# Altium PCB ADAS_ECU_MB_revA.PcbDoc (part 1 of 6)
Units mm, origin at the board's own origin, x right, y up, seen from the top; angles counter-clockwise.
Board outline 180 x 120 mm, 6 copper layers (Top Layer, Mid Layer 1, Mid Layer 2, Mid Layer 3, Mid Layer 4, Bottom Layer), stack 1.554 mm thick; 648 components, 505 nets, 4389 pads, 80 vias.
Unrouted connection lines stored in the file: 197.
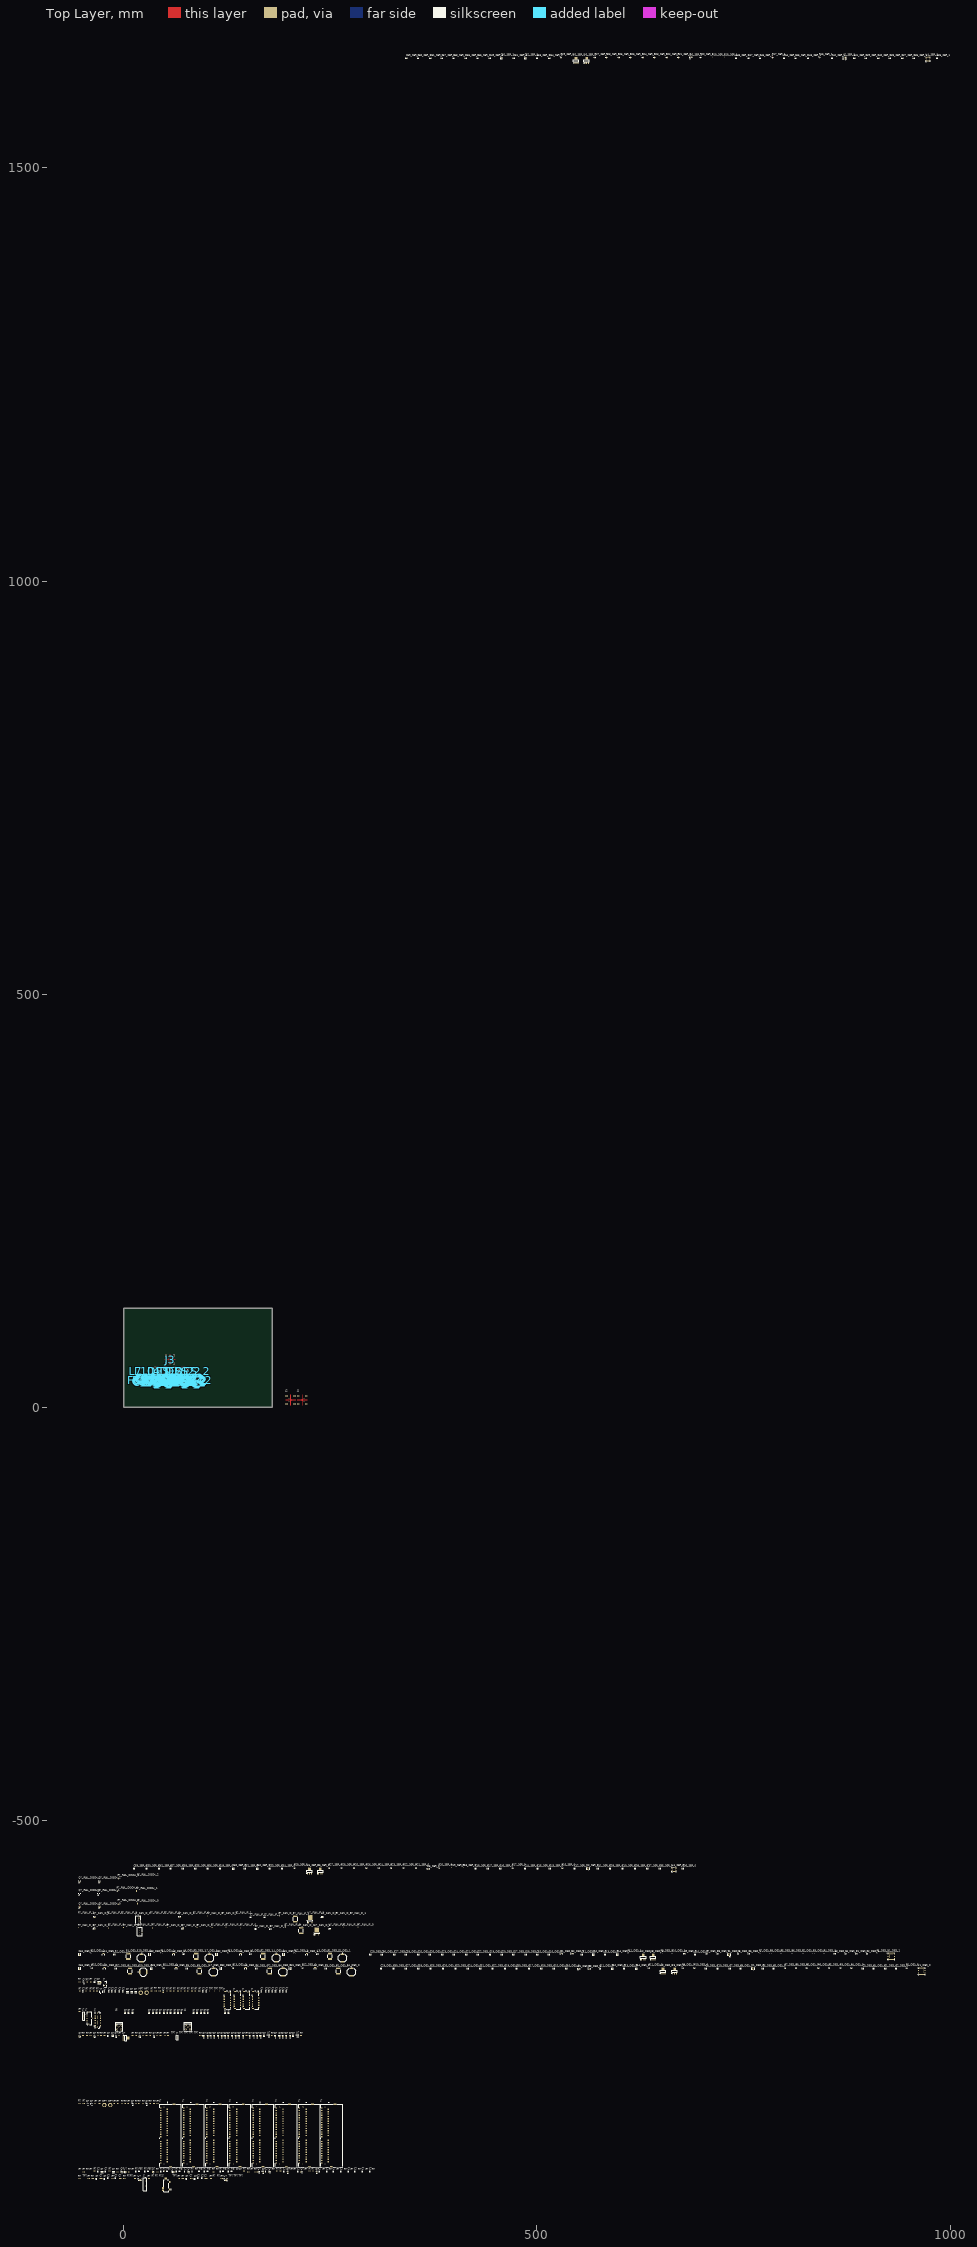
[diagram p0: Top Layer view]
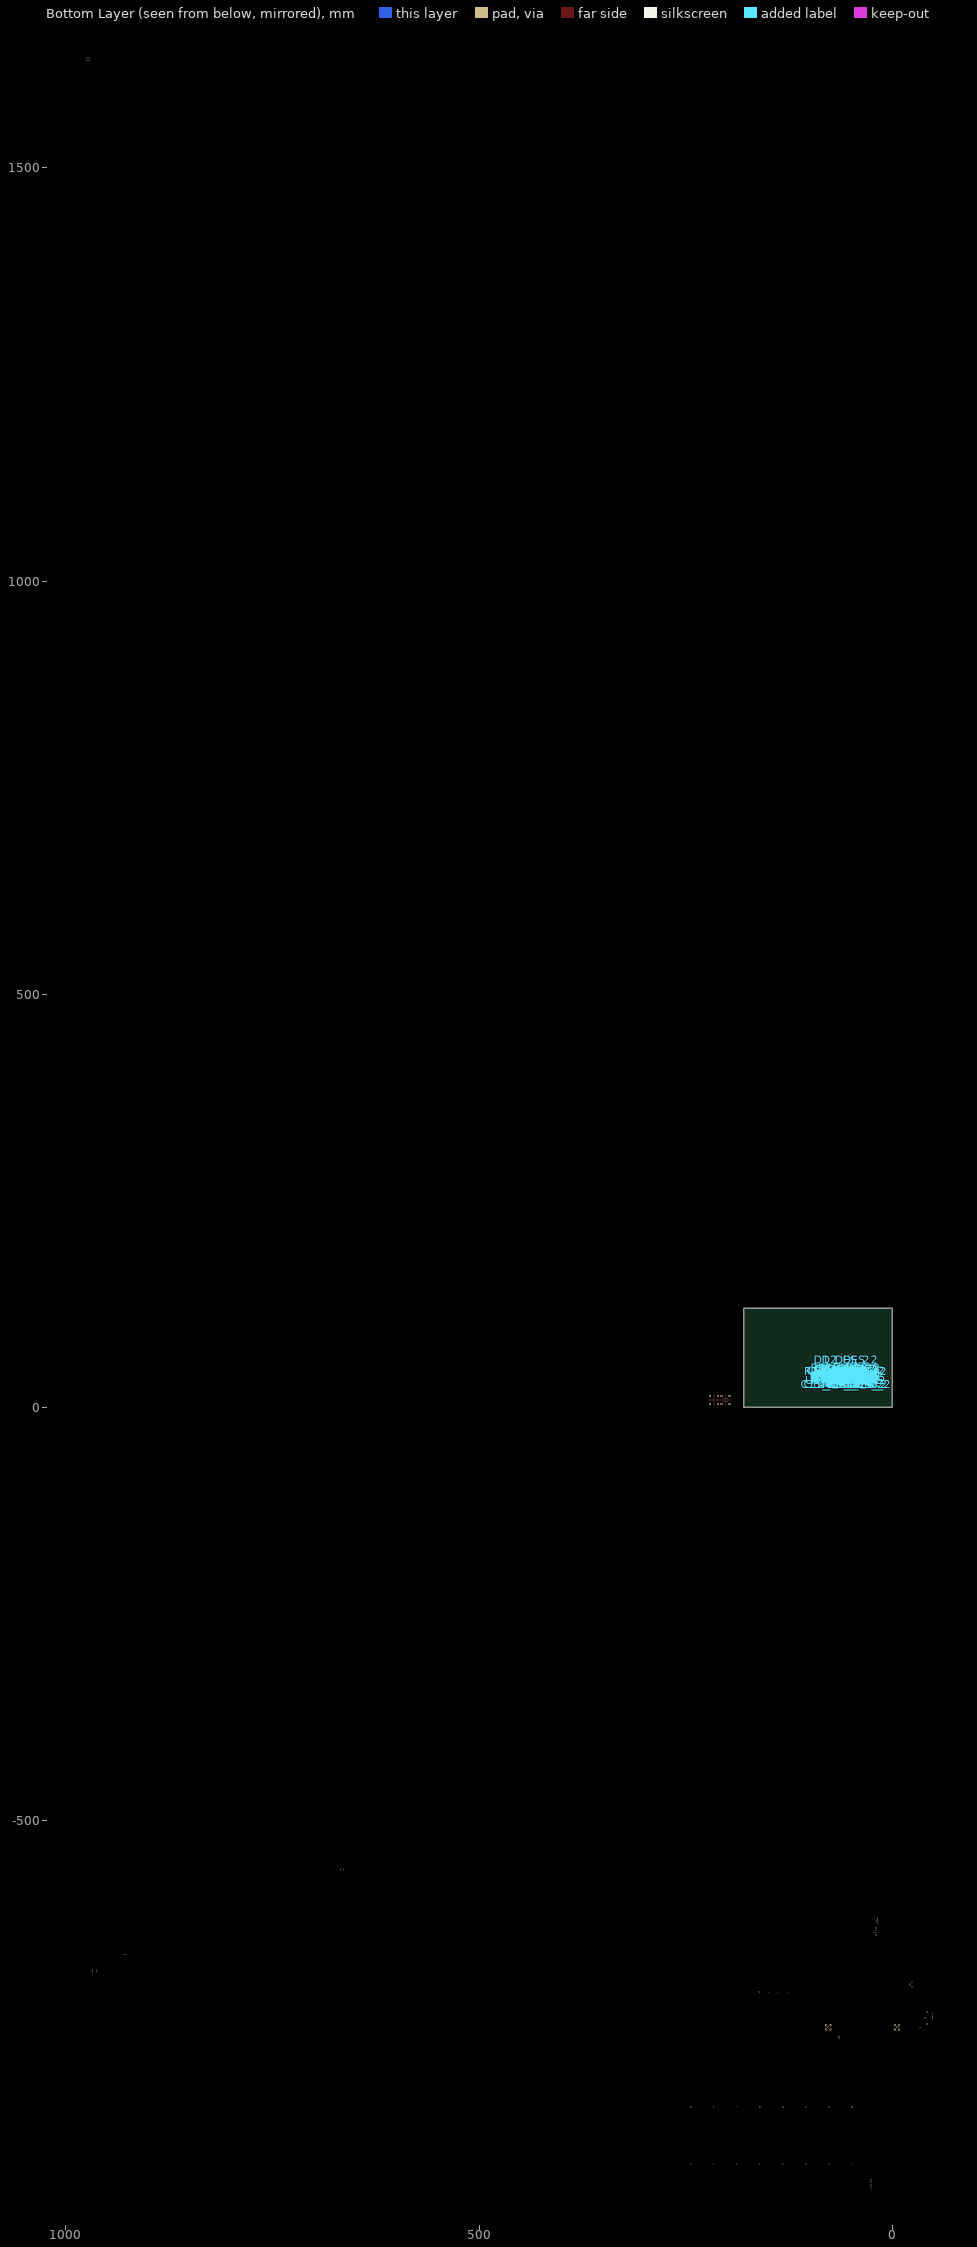
[diagram p1: Bottom Layer view, seen from below]

## Layer stack, top to bottom
Top Solder: solder mask 0.0127, Solder Resist, Dk 3.8
Top Layer: signal copper 0.035
Dielectric 1: prepreg 0.2104, 2313, Dk 4.05
Mid Layer 1: signal copper 0.0152
Core 1: core 0.4, FR-4, Dk 4.5
Mid Layer 2: signal copper 0.0152
Dielectric 2: prepreg 0.2028, 2116, Dk 4.25
Mid Layer 3: signal copper 0.0152
Core 2: core 0.4, FR-4, Dk 4.5
Mid Layer 4: signal copper 0.0152
Dielectric 3: prepreg 0.2104, 2313, Dk 4.05
Bottom Layer: signal copper 0.035
Bottom Solder: solder mask 0.0127, Solder Resist, Dk 3.8

## Board outline
0,0 180,0 180,120 0,120

## Design rules (kind name [scope] priority, off if disabled: settings)
BoardOutlineClearance [All] p1: gap=0.2 ignorepadtopadclearanceinfootprint=FALSE
Clearance [All] p1: gap=0.089 ignorepadtopadclearanceinfootprint=FALSE except(0.127: Arc-Via Track-Via SMDPad-Via THPad-Via Via-Via Via-Fill Via-Poly Via-Region Via-Text; 0.25: Arc-Hole Track-Hole SMDPad-Hole THPad-Hole Via-Hole Fill-Hole Poly-Hole Region-Hole Text-Hole)
ComponentClearance [All] p1: gap=0.089 collisioncheckmode=3 verticalgap=0.089 showdistances=TRUE
DiffPairsRouting 100DIFF [InDifferentialPairClass('100DIFF')] p1: maxlimit=0.2 minlimit=0.127 mostfreqgap=0.127 toplayer_mingap=0.2 toplayer_prefgap=0.2 toplayer_minwidth=0.163 toplayer_maxwidth=0.163 toplayer_prefwidth=0.163 midlayer1_maxgap=0.127 midlayer1_minwidth=0.101 midlayer1_maxwidth=0.101 midlayer1_prefwidth=0.101 midlayer2_maxgap=0.127 midlayer2_minwidth=0.096 midlayer2_maxwidth=0.096 midlayer2_prefwidth=0.096 midlayer3_maxgap=0.127 midlayer3_minwidth=0.096 midlayer3_maxwidth=0.096 midlayer3_prefwidth=0.096 midlayer4_maxgap=0.127 midlayer4_minwidth=0.101 midlayer4_maxwidth=0.101 midlayer4_prefwidth=0.101 bottomlayer_mingap=0.2 bottomlayer_prefgap=0.2 bottomlayer_minwidth=0.163 bottomlayer_maxwidth=0.163 bottomlayer_prefwidth=0.163 impedanceprofiledriven=TRUE impedanceprofileid={C7A9BCC2-5C8B-45AC-9D52-E18A9F04167A} impedanceprofilevalue=100.000000 maxuncoupledlength=12.7
DiffPairsRouting 90DIFF [InDifferentialPairClass('90DIFF')] p2: maxlimit=0.2 minlimit=0.127 mostfreqgap=0.127 toplayer_mingap=0.2 toplayer_prefgap=0.2 toplayer_minwidth=0.222 toplayer_maxwidth=0.222 toplayer_prefwidth=0.222 midlayer1_maxgap=0.127 midlayer1_minwidth=0.141 midlayer1_maxwidth=0.141 midlayer1_prefwidth=0.141 midlayer2_maxgap=0.127 midlayer2_minwidth=0.134 midlayer2_maxwidth=0.134 midlayer2_prefwidth=0.134 midlayer3_maxgap=0.127 midlayer3_minwidth=0.134 midlayer3_maxwidth=0.134 midlayer3_prefwidth=0.134 midlayer4_maxgap=0.127 midlayer4_minwidth=0.141 midlayer4_maxwidth=0.141 midlayer4_prefwidth=0.141 bottomlayer_mingap=0.2 bottomlayer_prefgap=0.2 bottomlayer_minwidth=0.222 bottomlayer_maxwidth=0.222 bottomlayer_prefwidth=0.222 impedanceprofiledriven=TRUE impedanceprofileid={3FA04896-F24A-4C4C-8FE7-887AC91E8F2A} impedanceprofilevalue=90.000000 maxuncoupledlength=12.7
DiffPairsRouting 85DIFF [InDifferentialPairClass('85DIFF')] p3: maxlimit=0.2 minlimit=0.127 mostfreqgap=0.127 toplayer_mingap=0.2 toplayer_prefgap=0.2 toplayer_minwidth=0.259 toplayer_maxwidth=0.259 toplayer_prefwidth=0.259 midlayer1_maxgap=0.127 midlayer1_minwidth=0.166 midlayer1_maxwidth=0.166 midlayer1_prefwidth=0.166 midlayer2_maxgap=0.127 midlayer2_minwidth=0.159 midlayer2_maxwidth=0.159 midlayer2_prefwidth=0.159 midlayer3_maxgap=0.127 midlayer3_minwidth=0.159 midlayer3_maxwidth=0.159 midlayer3_prefwidth=0.159 midlayer4_maxgap=0.127 midlayer4_minwidth=0.166 midlayer4_maxwidth=0.166 midlayer4_prefwidth=0.166 bottomlayer_mingap=0.2 bottomlayer_prefgap=0.2 bottomlayer_minwidth=0.259 bottomlayer_maxwidth=0.259 bottomlayer_prefwidth=0.259 impedanceprofiledriven=TRUE impedanceprofileid={6529A067-EDCB-4022-8723-74E45307CAC3} impedanceprofilevalue=85.000000 maxuncoupledlength=12.7
DiffPairsRouting [All] p4: maxlimit=0.089 minlimit=0.089 mostfreqgap=0.089 toplayer_minwidth=0.089 toplayer_maxwidth=1816.048 toplayer_prefwidth=0.089 midlayer1_minwidth=0.089 midlayer1_maxwidth=1816.048 midlayer1_prefwidth=0.089 midlayer2_minwidth=0.089 midlayer2_maxwidth=1816.048 midlayer2_prefwidth=0.089 midlayer3_minwidth=0.089 midlayer3_maxwidth=1816.048 midlayer3_prefwidth=0.089 midlayer4_minwidth=0.089 midlayer4_maxwidth=1816.048 midlayer4_prefwidth=0.089 bottomlayer_minwidth=0.089 bottomlayer_maxwidth=1816.048 bottomlayer_prefwidth=0.089 maxuncoupledlength=12.7
Height [All] p1: minheight=0 maxheight=1816.048 prefheight=12.7
HoleSize [All] p1: absolutevalues=TRUE maxlimit=6.3 minlimit=0.2 maxpercent=80.000 minpercent=20.000
HoleToHoleClearance [All] p1: gap=0.25 allowstackedmicrovias=FALSE
MinimumAnnularRing [All] p1: minimumring=0.076
MinimumSolderMaskSliver [All] p1: minsoldermaskwidth=0
PlaneClearance [All] p1: clearance=0.089
PlaneConnect PlaneConnectPowerPads [InPadClass('PowerPads')] p1: planeconnectstyle=Direct reliefexpansion=0.508 reliefentries=4 reliefconductorwidth=0.254 reliefairgap=0.254
PlaneConnect [All] p2: pad.planeconnectstyle=Relief pad.reliefexpansion=0.3 pad.reliefentries=4 pad.reliefconductorwidth=0.089 pad.reliefairgap=0.089 via.planeconnectstyle=Direct via.reliefexpansion=0.3 via.reliefentries=4 via.reliefconductorwidth=0.127 via.reliefairgap=0.127
PolygonConnect PolygonConnectPowerPads [All vs (InPadClass('PowerPads'))] p1: connectstyle=Direct reliefconductorwidth=0.254 reliefentries=4 polygonreliefangle="90 Angle" airgapwidth=0.254
PolygonConnect [All] p2: thpad.connectstyle=Relief thpad.reliefconductorwidth=0.089 thpad.reliefentries=4 thpad.polygonreliefangle="90 Angle" thpad.airgapwidth=0.089 smdpad.connectstyle=Relief smdpad.reliefconductorwidth=0.089 smdpad.reliefentries=4 smdpad.polygonreliefangle="90 Angle" smdpad.airgapwidth=0.089 via.connectstyle=Direct via.reliefconductorwidth=0.127 via.reliefentries=4 via.polygonreliefangle="90 Angle" via.airgapwidth=0.127
RoomDefinition DES_2 [InComponentClass('DES_2')] p1: confinementstyle=ConfineIn formatcopy=TRUE lockcomponents=FALSE outline 34,24 78,24 78,68 34,68
RoomDefinition SER_1 [InComponentClass('SER_1')] p2: confinementstyle=ConfineIn formatcopy=TRUE lockcomponents=FALSE outline -322,-342 -197,-342 -197,-271 -322,-271
RoomDefinition SER_0 [InComponentClass('SER_0')] p3: confinementstyle=ConfineIn formatcopy=TRUE lockcomponents=FALSE outline -297,-331 -211,-331 -211,-289 -297,-289
RoomDefinition DES_1 [InComponentClass('DES_1')] p4: confinementstyle=ConfineIn formatcopy=TRUE lockcomponents=FALSE outline -178,-259 -104,-259 -104,-215 -178,-215
RoomDefinition DES_0 [InComponentClass('DES_0')] p5: confinementstyle=ConfineIn formatcopy=TRUE lockcomponents=FALSE outline -310,-343 -266,-343 -266,-314 -310,-314
RoutingVias [All] p1: holewidth=0.2 width=0.45 viastyle="Through Hole" minholewidth=0.2 minwidth=0.45 maxholewidth=6.3 maxwidth=6.55
SilkToSilkClearance [All] p1: silktosilkclearance=0
SilkToSolderMaskClearance [IsPad] p1: minsilkscreentomaskgap=0.089 clearancetoexposedcopper=TRUE
SolderMaskExpansion [All] p1: expansion=0.075 istentingtop=FALSE
SupplyNets "Schematic Supply Nets_8" [InNet('RAIL_RAIL_DISCH_2')] p1: voltage=0.000
SupplyNets "Schematic Supply Nets_7" [InNet('GND')] p2: voltage=0.000
SupplyNets "Schematic Supply Nets_6" [InNet('RAIL_RAIL_DISCH_1')] p3: voltage=0.000
SupplyNets "Schematic Supply Nets_5" [InNet('INT_VCC')] p4: voltage=0.000
SupplyNets "Schematic Supply Nets_4" [InNet('1V8')] p5: voltage=0.000
SupplyNets "Schematic Supply Nets_3" [InNet('5V_MAIN')] p6: voltage=0.000
SupplyNets "Schematic Supply Nets_2" [InNet('1V2')] p7: voltage=0.000
SupplyNets "Schematic Supply Nets_1" [InNet('FAN_VDDIO_FAN_IF_0')] p8: voltage=0.000
SupplyNets "Schematic Supply Nets" [InNet('RAIL_RAIL_DISCH_0')] p9: voltage=0.000
Width 50SINGLE [InNetClass('50SINGLE')] p1: maxlimit=0.199 minlimit=0.17 preferedwidth=0.18 toplayer_minwidth=0.199 toplayer_prefwidth=0.199 midlayer1_minwidth=0.18 midlayer1_maxwidth=0.18 midlayer2_maxwidth=0.17 midlayer2_prefwidth=0.17 midlayer3_maxwidth=0.17 midlayer3_prefwidth=0.17 midlayer4_minwidth=0.18 midlayer4_maxwidth=0.18 bottomlayer_minwidth=0.199 bottomlayer_prefwidth=0.199 impedanceprofiledriven=TRUE impedanceprofileid={5E629595-9142-4542-B4F5-3DDBBC1C75C9} impedanceprofilevalue=50.000000 minimp=50.000000 maximp=50.000000 favimp=50.000000
Width [All] p2: maxlimit=1816.048 minlimit=0.089 preferedwidth=0.089
20 further rules are at their usual default settings.

## Classes and differential pairs
component class REC_USB_0: C? J? Q? R?
component class HDMI_0: C? D? FB? Q? R? U?
component class MAIN_BOARD: C? J1 J2 J3 J4 J5 J? R?
component class NVME_0: C? D? J? MP? R? TP? Y?
component class JETSON: C? D? J? MP? Q? R? TP? U?
differential pair class PRECSI: CKB_DES_0 CKB_DES_1 DB0_DES_0 DB0_DES_1 DB1_DES_0 DB1_DES_1
differential pair class CSI: CLK_SER_0 CLK_SER_1 DA0_SER_0 DA0_SER_1 DA1_SER_0 DA1_SER_1 DA2_SER_0 DA2_SER_1 DA3_SER_0 DA3_SER_1
differential pair class CSI1: CKB_DES_0 CKB_DES_1 CKB_DES_2 DB0_DES_0 DB0_DES_1 DB0_DES_2 DB1_DES_0 DB1_DES_1 DB1_DES_2 DB2_DES_0 DB2_DES_1 DB2_DES_2 DB3_DES_0 DB3_DES_1 DB3_DES_2
differential pair class CSI1_PRE: CKB_DES_0 CKB_DES_1 CKB_DES_2 DB0_DES_0 DB0_DES_1 DB0_DES_2 DB1_DES_0 DB1_DES_1 DB1_DES_2 DB2_DES_0 DB2_DES_1 DB2_DES_2 DB3_DES_0 DB3_DES_1 DB3_DES_2
differential pair class CSI0: CKA_DES_0 CKA_DES_1 CKA_DES_2 DA0_DES_0 DA0_DES_1 DA0_DES_2 DA1_DES_0 DA1_DES_1 DA1_DES_2 DA2_DES_0 DA2_DES_1 DA2_DES_2 DA3_DES_0 DA3_DES_1 DA3_DES_2
differential pair class CSI0_PRE: CKC_DES_0 CKC_DES_1 CKC_DES_2 DA0_DES_0 DA0_DES_1 DA0_DES_2 DA1_DES_0 DA1_DES_1 DA1_DES_2 DA2_DES_0 DA2_DES_1 DA2_DES_2 DA3_DES_0 DA3_DES_1 DA3_DES_2
differential pair class 100DIFF: DB2_DES_0 DB2_DES_1 DB3_DES_0 DB3_DES_1 DP1_TXD0 DP1_TXD1 DP1_TXD2 DP1_TXD3 GBE_MDI0 GBE_MDI1 GBE_MDI2 GBE_MDI3 HDMI_CLK HDMI_D0 HDMI_D1 HDMI_D2 PRE_CSI0_D1 PRE_CSI1_D0 SIO_SER_0 SIO_SER_1 SIOA_DES_0 SIOA_DES_1 SIOA_DES_2 SIOB_DES_0 SIOB_DES_1 SIOB_DES_2 SIOC_DES_0 SIOC_DES_1 SIOC_DES_2 SIOD_DES_0 SIOD_DES_1 SIOD_DES_2
differential pair class 90DIFF: USB0_D USB1_D
differential pair class 85DIFF: PCIE0_CLK PCIE0_RX0 PCIE0_RX1 PCIE0_RX2 PCIE0_RX3 PCIE0_TX0 PCIE0_TX1 PCIE0_TX2 PCIE0_TX3 PCIE_RX0 PCIE_RX1 PCIE_RX2 PCIE_RX3 PRE_CLK PRE_TX0 PRE_TX1 PRE_TX2 PRE_TX3 USBSS0_RX USBSS0_TX
channel class RAIL_DISCHARGE: RAIL_DISCH_0 RAIL_DISCH_1 RAIL_DISCH_2
channel class GMSL_SERIALIZER: SER_0 SER_1
channel class GMSL_DESERIALIZER: DES_0 DES_1 DES_2
channel class FAN_IF: FAN_IF_0 FAN_IF_1
net class PWR: NetC31_DES_0_1 NetC31_DES_1_1 NetC31_DES_2_1 NetC32_DES_0_1 NetC32_DES_1_1 NetC32_DES_2_1 NetC33_DES_0_1 NetC33_DES_1_1 NetC33_DES_2_1 NetC34_DES_0_1 NetC34_DES_1_1 NetC34_DES_2_1 NetF1_DES_0_2 NetF1_DES_1_2 NetF1_DES_2_2 NetF2_DES_0_2 NetF2_DES_1_2 NetF2_DES_2_2 NetF3_DES_0_2 NetF3_DES_1_2 NetF3_DES_2_2 NetF4_DES_0_2 NetF4_DES_1_2 NetF4_DES_2_2 NetL2_DES_0_2 NetL2_DES_1_2 NetL2_DES_2_2 NetL5_DES_0_2 NetL5_DES_1_2 NetL5_DES_2_2 NetL8_DES_0_2 NetL8_DES_1_2 NetL8_DES_2_2 NetL11_DES_0_2 NetL11_DES_1_2 NetL11_DES_2_2 PoC_PWR_DES_0 PoC_PWR_DES_1 PoC_PWR_DES_2
net class 100DIFF: CSI0_CLK_N CSI0_CLK_P CSI0_D0_N CSI0_D0_P CSI0_D1_N CSI0_D1_P CSI1_D0_N CSI1_D0_P CSI1_D1_N CSI1_D1_P CSI2_CLK_N CSI2_CLK_P CSI2_D0_N CSI2_D0_P CSI2_D1_N CSI2_D1_P CSI3_D0_N CSI3_D0_P CSI3_D1_N CSI3_D1_P DP1_TXD0_N DP1_TXD0_P DP1_TXD1_N DP1_TXD1_P DP1_TXD2_N DP1_TXD2_P DP1_TXD3_N DP1_TXD3_P DP_D0_N DP_D0_P DP_D1_N DP_D1_P DP_D2_N DP_D2_P DP_D3_N DP_D3_P GBE_MDI0_N GBE_MDI0_P GBE_MDI1_N GBE_MDI1_P GBE_MDI2_N GBE_MDI2_P GBE_MDI3_N GBE_MDI3_P HDMI_CLK_N HDMI_CLK_P HDMI_D0_N HDMI_D0_P HDMI_D1_N HDMI_D1_P HDMI_D2_N HDMI_D2_P PLDWN_1 PLDWN_2 PLDWN_3 PLDWN_4 PLDWN_5 PLDWN_6 PLDWN_7 PLDWN_8 PRE_CSI0_D1_N PRE_CSI0_D1_P PRE_CSI1_D0_N PRE_CSI1_D0_P
net class 90DIFF: USB0_D_N USB0_D_P USB1_D_N USB1_D_P
net class 85DIFF: PCIE0_CLK_N PCIE0_CLK_P PCIE0_RX0_N PCIE0_RX0_P PCIE0_RX1_N PCIE0_RX1_P PCIE0_RX2_N PCIE0_RX2_P PCIE0_RX3_N PCIE0_RX3_P PCIE0_TX0_N PCIE0_TX0_P PCIE0_TX1_N PCIE0_TX1_P PCIE0_TX2_N PCIE0_TX2_P PCIE0_TX3_N PCIE0_TX3_P PCIE_RX0_N PCIE_RX0_P PCIE_RX1_N PCIE_RX1_P PCIE_RX2_N PCIE_RX2_P PCIE_RX3_N PCIE_RX3_P PRE_CLK_N PRE_CLK_P PRE_TX0_N PRE_TX0_P PRE_TX1_N PRE_TX1_P PRE_TX2_N PRE_TX2_P PRE_TX3_N PRE_TX3_P USBSS0_RX_N USBSS0_RX_P USBSS0_TX_N USBSS0_TX_P
net class 50SINGLE: NetC3_DES_0_2 NetC3_DES_1_2 NetC3_DES_2_2 NetC4_DES_0_2 NetC4_DES_1_2 NetC4_DES_2_2 NetC7_DES_0_2 NetC7_DES_1_2 NetC7_DES_2_2 NetC8_DES_0_2 NetC8_DES_1_2 NetC8_DES_2_2 PoC_A_DES_0 PoC_A_DES_1 PoC_A_DES_2 PoC_B_DES_0 PoC_B_DES_1 PoC_B_DES_2 PoC_C_DES_0 PoC_C_DES_1 PoC_C_DES_2 PoC_D_DES_0 PoC_D_DES_1 PoC_D_DES_2 PoC_TAP_SER_0 PoC_TAP_SER_1
net class 45SINGLE: USB0_D_N USB0_D_P
component class SER_1: C35_SER_1 C36_SER_1 C37_SER_1 C38_SER_1 C39_SER_1 C40_SER_1 C41_SER_1 C42_SER_1 C43_SER_1 C44_SER_1 C45_SER_1 C46_SER_1 C47_SER_1 C48_SER_1 C49_SER_1 C50_SER_1 C51_SER_1 C52_SER_1 C53_SER_1 C54_SER_1 C55_SER_1 C56_SER_1 C57_SER_1 C58_SER_1 C59_SER_1 C60_SER_1 C61_SER_1 D5_SER_1 R16_SER_1 R17_SER_1 R18_SER_1 R19_SER_1 R20_SER_1 R21_SER_1 R22_SER_1 R23_SER_1 R24_SER_1 R25_SER_1 R26_SER_1 R27_SER_1 R28_SER_1 R29_SER_1 U4_SER_1 U5_SER_1 U6_SER_1 Y2_SER_1
component class SER_0: C35_SER_0 C36_SER_0 C37_SER_0 C38_SER_0 C39_SER_0 C40_SER_0 C41_SER_0 C42_SER_0 C43_SER_0 C44_SER_0 C45_SER_0 C46_SER_0 C47_SER_0 C48_SER_0 C49_SER_0 C50_SER_0 C51_SER_0 C52_SER_0 C53_SER_0 C54_SER_0 C55_SER_0 C56_SER_0 C57_SER_0 C58_SER_0 C59_SER_0 C60_SER_0 C61_SER_0 D5_SER_0 R16_SER_0 R17_SER_0 R18_SER_0 R19_SER_0 R20_SER_0 R21_SER_0 R22_SER_0 R23_SER_0 R24_SER_0 R25_SER_0 R26_SER_0 R27_SER_0 R28_SER_0 R29_SER_0 U4_SER_0 U5_SER_0 U6_SER_0 Y2_SER_0
component class RAIL_DISCH_2: Q?_RAIL_DISCH_2 R?_RAIL_DISCH_2
component class RAIL_DISCH_1: Q?_RAIL_DISCH_1 R?_RAIL_DISCH_1
component class RAIL_DISCH_0: Q?_RAIL_DISCH_0 R?_RAIL_DISCH_0
component class FAN_IF_1: C?_FAN_IF_1 F?_FAN_IF_1 J?_FAN_IF_1 Q?_FAN_IF_1 R?_FAN_IF_1 U?_FAN_IF_1
component class FAN_IF_0: C?_FAN_IF_0 F?_FAN_IF_0 J?_FAN_IF_0 Q?_FAN_IF_0 R?_FAN_IF_0 U?_FAN_IF_0
component class DES_2: C1_DES_2 C2_DES_2 C3_DES_2 C4_DES_2 C5_DES_2 C6_DES_2 C7_DES_2 C8_DES_2 C9_DES_2 C10_DES_2 C11_DES_2 C12_DES_2 C13_DES_2 C14_DES_2 C15_DES_2 C16_DES_2 C17_DES_2 C18_DES_2 C19_DES_2 C20_DES_2 C21_DES_2 C22_DES_2 C23_DES_2 C24_DES_2 C25_DES_2 C26_DES_2 C27_DES_2 C28_DES_2 C29_DES_2 C30_DES_2 C31_DES_2 C32_DES_2 C33_DES_2 C34_DES_2 D1_DES_2 D2_DES_2 F1_DES_2 F2_DES_2 F3_DES_2 F4_DES_2 L1_DES_2 L2_DES_2 L3_DES_2 L4_DES_2 L5_DES_2 L6_DES_2 L7_DES_2 L8_DES_2 L9_DES_2 L10_DES_2 L11_DES_2 L12_DES_2 R1_DES_2 R2_DES_2 R3_DES_2 R4_DES_2 R5_DES_2 R6_DES_2 R7_DES_2 R8_DES_2 R9_DES_2 R10_DES_2 R11_DES_2 R12_DES_2 R13_DES_2 R14_DES_2 R15_DES_2 U1_DES_2 U2_DES_2 U3_DES_2 Y1_DES_2
component class DES_1: C1_DES_1 C2_DES_1 C3_DES_1 C4_DES_1 C5_DES_1 C6_DES_1 C7_DES_1 C8_DES_1 C9_DES_1 C10_DES_1 C11_DES_1 C12_DES_1 C13_DES_1 C14_DES_1 C15_DES_1 C16_DES_1 C17_DES_1 C18_DES_1 C19_DES_1 C20_DES_1 C21_DES_1 C22_DES_1 C23_DES_1 C24_DES_1 C25_DES_1 C26_DES_1 C27_DES_1 C28_DES_1 C29_DES_1 C30_DES_1 C31_DES_1 C32_DES_1 C33_DES_1 C34_DES_1 D1_DES_1 D2_DES_1 F1_DES_1 F2_DES_1 F3_DES_1 F4_DES_1 L1_DES_1 L2_DES_1 L3_DES_1 L4_DES_1 L5_DES_1 L6_DES_1 L7_DES_1 L8_DES_1 L9_DES_1 L10_DES_1 L11_DES_1 L12_DES_1 R1_DES_1 R2_DES_1 R3_DES_1 R4_DES_1 R5_DES_1 R6_DES_1 R7_DES_1 R8_DES_1 R9_DES_1 R10_DES_1 R11_DES_1 R12_DES_1 R13_DES_1 R14_DES_1 R15_DES_1 U1_DES_1 U2_DES_1 U3_DES_1 Y1_DES_1
component class DES_0: C1_DES_0 C2_DES_0 C3_DES_0 C4_DES_0 C5_DES_0 C6_DES_0 C7_DES_0 C8_DES_0 C9_DES_0 C10_DES_0 C11_DES_0 C12_DES_0 C13_DES_0 C14_DES_0 C15_DES_0 C16_DES_0 C17_DES_0 C18_DES_0 C19_DES_0 C20_DES_0 C21_DES_0 C22_DES_0 C23_DES_0 C24_DES_0 C25_DES_0 C26_DES_0 C27_DES_0 C28_DES_0 C29_DES_0 C30_DES_0 C31_DES_0 C32_DES_0 C33_DES_0 C34_DES_0 D1_DES_0 D2_DES_0 F1_DES_0 F2_DES_0 F3_DES_0 F4_DES_0 L1_DES_0 L2_DES_0 L3_DES_0 L4_DES_0 L5_DES_0 L6_DES_0 L7_DES_0 L8_DES_0 L9_DES_0 L10_DES_0 L11_DES_0 L12_DES_0 R1_DES_0 R2_DES_0 R3_DES_0 R4_DES_0 R5_DES_0 R6_DES_0 R7_DES_0 R8_DES_0 R9_DES_0 R10_DES_0 R11_DES_0 R12_DES_0 R13_DES_0 R14_DES_0 R15_DES_0 U1_DES_0 U2_DES_0 U3_DES_0 Y1_DES_0
component class DAC_0: C? J? R? TP? U?
differential pair X25_SER_1: +X25_SER_1_P -X25_SER_1_N
differential pair X25_SER_0: +X25_SER_0_P -X25_SER_0_N
differential pair X25_DES_2: +X25_DES_2_P -X25_DES_2_N
differential pair X25_DES_1: +X25_DES_1_P -X25_DES_1_N
differential pair X25_DES_0: +X25_DES_0_P -X25_DES_0_N
differential pair USBSS0_TX: +USBSS0_TX_P -USBSS0_TX_N
differential pair USBSS0_RX: +USBSS0_RX_P -USBSS0_RX_N
differential pair USB1_D: +USB1_D_P -USB1_D_N
differential pair USB0_D: +USB0_D_P -USB0_D_N
differential pair SIOD_DES_2: +SIOD_DES_2_P -SIOD_DES_2_N
differential pair SIOD_DES_1: +SIOD_DES_1_P -SIOD_DES_1_N
differential pair SIOD_DES_0: +SIOD_DES_0_P -SIOD_DES_0_N
differential pair SIOC_DES_2: +SIOC_DES_2_P -SIOC_DES_2_N
differential pair SIOC_DES_1: +SIOC_DES_1_P -SIOC_DES_1_N
differential pair SIOC_DES_0: +SIOC_DES_0_P -SIOC_DES_0_N
differential pair SIOB_DES_2: +SIOB_DES_2_P -SIOB_DES_2_N
differential pair SIOB_DES_1: +SIOB_DES_1_P -SIOB_DES_1_N
differential pair SIOB_DES_0: +SIOB_DES_0_P -SIOB_DES_0_N
differential pair SIOA_DES_2: +SIOA_DES_2_P -SIOA_DES_2_N
differential pair SIOA_DES_1: +SIOA_DES_1_P -SIOA_DES_1_N
differential pair SIOA_DES_0: +SIOA_DES_0_P -SIOA_DES_0_N
differential pair SIO_SER_1: +SIO_SER_1_P -SIO_SER_1_N
differential pair SIO_SER_0: +SIO_SER_0_P -SIO_SER_0_N
differential pair PRE_TX3: +PRE_TX3_P -PRE_TX3_N
differential pair PRE_TX2: +PRE_TX2_P -PRE_TX2_N
differential pair PRE_TX1: +PRE_TX1_P -PRE_TX1_N
differential pair PRE_TX0: +PRE_TX0_P -PRE_TX0_N
differential pair PRE_CSI1_D0: +PRE_CSI1_D0_P -PRE_CSI1_D0_N
differential pair PRE_CSI0_D1: +PRE_CSI0_D1_P -PRE_CSI0_D1_N
differential pair PRE_CLK: +PRE_CLK_P -PRE_CLK_N
differential pair PCIE_RX3: +PCIE_RX3_P -PCIE_RX3_N
differential pair PCIE_RX2: +PCIE_RX2_P -PCIE_RX2_N
differential pair PCIE_RX1: +PCIE_RX1_P -PCIE_RX1_N
differential pair PCIE_RX0: +PCIE_RX0_P -PCIE_RX0_N
differential pair PCIE0_TX3: +PCIE0_TX3_P -PCIE0_TX3_N
differential pair PCIE0_TX2: +PCIE0_TX2_P -PCIE0_TX2_N
differential pair PCIE0_TX1: +PCIE0_TX1_P -PCIE0_TX1_N
differential pair PCIE0_TX0: +PCIE0_TX0_P -PCIE0_TX0_N
differential pair PCIE0_RX3: +PCIE0_RX3_P -PCIE0_RX3_N
differential pair PCIE0_RX2: +PCIE0_RX2_P -PCIE0_RX2_N
differential pair PCIE0_RX1: +PCIE0_RX1_P -PCIE0_RX1_N
differential pair PCIE0_RX0: +PCIE0_RX0_P -PCIE0_RX0_N
differential pair PCIE0_CLK: +PCIE0_CLK_P -PCIE0_CLK_N
differential pair HDMI_D2: +HDMI_D2_P -HDMI_D2_N
differential pair HDMI_D1: +HDMI_D1_P -HDMI_D1_N
differential pair HDMI_D0: +HDMI_D0_P -HDMI_D0_N
differential pair HDMI_CLK: +HDMI_CLK_P -HDMI_CLK_N
differential pair GBE_MDI3: +GBE_MDI3_P -GBE_MDI3_N
differential pair GBE_MDI2: +GBE_MDI2_P -GBE_MDI2_N
differential pair GBE_MDI1: +GBE_MDI1_P -GBE_MDI1_N
differential pair GBE_MDI0: +GBE_MDI0_P -GBE_MDI0_N
differential pair DP1_TXD3: +DP1_TXD3_P -DP1_TXD3_N
differential pair DP1_TXD2: +DP1_TXD2_P -DP1_TXD2_N
differential pair DP1_TXD1: +DP1_TXD1_P -DP1_TXD1_N
differential pair DP1_TXD0: +DP1_TXD0_P -DP1_TXD0_N
differential pair DP1_AUX: +DP1_AUX_P -DP1_AUX_N
differential pair DB3_DES_2: +DB3_DES_2_P -DB3_DES_2_N
differential pair DB3_DES_1: +DB3_DES_1_P -DB3_DES_1_N
differential pair DB3_DES_0: +DB3_DES_0_P -DB3_DES_0_N
differential pair DB2_DES_2: +DB2_DES_2_P -DB2_DES_2_N
differential pair DB2_DES_1: +DB2_DES_1_P -DB2_DES_1_N
differential pair DB2_DES_0: +DB2_DES_0_P -DB2_DES_0_N
differential pair DB1_DES_2: +DB1_DES_2_P -DB1_DES_2_N
differential pair DB1_DES_1: +DB1_DES_1_P -DB1_DES_1_N
differential pair DB1_DES_0: +DB1_DES_0_P -DB1_DES_0_N
differential pair DB0_DES_2: +DB0_DES_2_P -DB0_DES_2_N
differential pair DB0_DES_1: +DB0_DES_1_P -DB0_DES_1_N
differential pair DB0_DES_0: +DB0_DES_0_P -DB0_DES_0_N
differential pair DA3_SER_1: +DA3_SER_1_P -DA3_SER_1_N
differential pair DA3_SER_0: +DA3_SER_0_P -DA3_SER_0_N
differential pair DA3_DES_2: +DA3_DES_2_P -DA3_DES_2_N
differential pair DA3_DES_1: +DA3_DES_1_P -DA3_DES_1_N
differential pair DA3_DES_0: +DA3_DES_0_P -DA3_DES_0_N
differential pair DA2_SER_1: +DA2_SER_1_P -DA2_SER_1_N
differential pair DA2_SER_0: +DA2_SER_0_P -DA2_SER_0_N
differential pair DA2_DES_2: +DA2_DES_2_P -DA2_DES_2_N
differential pair DA2_DES_1: +DA2_DES_1_P -DA2_DES_1_N
differential pair DA2_DES_0: +DA2_DES_0_P -DA2_DES_0_N
differential pair DA1_SER_1: +DA1_SER_1_P -DA1_SER_1_N
differential pair DA1_SER_0: +DA1_SER_0_P -DA1_SER_0_N
differential pair DA1_DES_2: +DA1_DES_2_P -DA1_DES_2_N
differential pair DA1_DES_1: +DA1_DES_1_P -DA1_DES_1_N
differential pair DA1_DES_0: +DA1_DES_0_P -DA1_DES_0_N
differential pair DA0_SER_1: +DA0_SER_1_P -DA0_SER_1_N
differential pair DA0_SER_0: +DA0_SER_0_P -DA0_SER_0_N
differential pair DA0_DES_2: +DA0_DES_2_P -DA0_DES_2_N
differential pair DA0_DES_1: +DA0_DES_1_P -DA0_DES_1_N
differential pair DA0_DES_0: +DA0_DES_0_P -DA0_DES_0_N
differential pair CLK_SER_1: +CLK_SER_1_P -CLK_SER_1_N
differential pair CLK_SER_0: +CLK_SER_0_P -CLK_SER_0_N
differential pair CKB_DES_2: +CKB_DES_2_P -CKB_DES_2_N
differential pair CKB_DES_1: +CKB_DES_1_P -CKB_DES_1_N
differential pair CKB_DES_0: +CKB_DES_0_P -CKB_DES_0_N
differential pair CKA_DES_2: +CKA_DES_2_P -CKA_DES_2_N
differential pair CKA_DES_1: +CKA_DES_1_P -CKA_DES_1_N
differential pair CKA_DES_0: +CKA_DES_0_P -CKA_DES_0_N

## Components (designator, comment, footprint, x,y, rotation, side; value= is the part's Value field where it differs from the comment)
C1_DES_0 "100n" FP-0402-L_1_0_0_05-W_0_5-IPC_A 921.629,-679.081 r90 top (schematic designator C1)
C1_DES_1 "100n" FP-0402-L_1_0_0_05-W_0_5-IPC_A 886.629,-661.08 r90 top (schematic designator C1)
C1_DES_2 "100n" FP-0402-L_1_0_0_05-W_0_5-IPC_A 63,35 r45 bottom (schematic designator C1)
C2_DES_0 "100n" FP-0402-L_1_0_0_05-W_0_5-IPC_A 934.629,-679.081 r90 top (schematic designator C2)
C2_DES_1 "100n" FP-0402-L_1_0_0_05-W_0_5-IPC_A 899.629,-661.08 r90 top (schematic designator C2)
C2_DES_2 "100n" FP-0402-L_1_0_0_05-W_0_5-IPC_A 60,38 r45 bottom (schematic designator C2)
C3_DES_0 "100n" FP-0402-L_1_0_0_05-W_0_5-IPC_A 894.629,-679.081 r90 top (schematic designator C3)
C3_DES_1 "100n" FP-0402-L_1_0_0_05-W_0_5-IPC_A 860.629,-661.08 r90 top (schematic designator C3)
C3_DES_2 "100n" FP-0402-L_1_0_0_05-W_0_5-IPC_A 62,36 r45 bottom (schematic designator C3)
C4_DES_0 "100n" FP-0402-L_1_0_0_05-W_0_5-IPC_A 907.629,-679.081 r90 top (schematic designator C4)
C4_DES_1 "100n" FP-0402-L_1_0_0_05-W_0_5-IPC_A 873.629,-661.08 r90 top (schematic designator C4)
C4_DES_2 "100n" FP-0402-L_1_0_0_05-W_0_5-IPC_A 61,37 r45 bottom (schematic designator C4)
C5_DES_0 "100n" FP-0402-L_1_0_0_05-W_0_5-IPC_A 773.629,-679.081 r90 top (schematic designator C5)
C5_DES_1 "100n" FP-0402-L_1_0_0_05-W_0_5-IPC_A 743.629,-661.08 r90 top (schematic designator C5)
C5_DES_2 "100n" FP-0402-L_1_0_0_05-W_0_5-IPC_A 52,38 r135 bottom (schematic designator C5)
C6_DES_0 "100n" FP-0402-L_1_0_0_05-W_0_5-IPC_A 786.629,-679.081 r90 top (schematic designator C6)
C6_DES_1 "100n" FP-0402-L_1_0_0_05-W_0_5-IPC_A 756.629,-661.08 r90 top (schematic designator C6)
C6_DES_2 "100n" FP-0402-L_1_0_0_05-W_0_5-IPC_A 49,35 r135 bottom (schematic designator C6)
C7_DES_0 "100n" FP-0402-L_1_0_0_05-W_0_5-IPC_A 733.629,-679.081 r90 top (schematic designator C7)
C7_DES_1 "100n" FP-0402-L_1_0_0_05-W_0_5-IPC_A 705.629,-661.08 r90 top (schematic designator C7)
C7_DES_2 "100n" FP-0402-L_1_0_0_05-W_0_5-IPC_A 51,37 r135 bottom (schematic designator C7)
C8_DES_0 "100n" FP-0402-L_1_0_0_05-W_0_5-IPC_A 746.629,-679.081 r90 top (schematic designator C8)
C8_DES_1 "100n" FP-0402-L_1_0_0_05-W_0_5-IPC_A 718.629,-661.08 r90 top (schematic designator C8)
C8_DES_2 "100n" FP-0402-L_1_0_0_05-W_0_5-IPC_A 50,36 r135 bottom (schematic designator C8)
C9_DES_0 "30p" FP-0402-L_1_0_0_05-W_0_5-IPC_A 704.629,-679.081 r90 top (schematic designator C9)
C9_DES_1 "30p" FP-0402-L_1_0_0_05-W_0_5-IPC_A 678.629,-661.08 r90 top (schematic designator C9)
C9_DES_2 "30p" FP-0402-L_1_0_0_05-W_0_5-IPC_A 54,40 r315 bottom (schematic designator C9)
C10_DES_0 "30p" FP-0402-L_1_0_0_05-W_0_5-IPC_A 718.629,-679.081 r90 top (schematic designator C10)
C10_DES_1 "30p" FP-0402-L_1_0_0_05-W_0_5-IPC_A 691.629,-662.08 r90 top (schematic designator C10)
C10_DES_2 "30p" FP-0402-L_1_0_0_05-W_0_5-IPC_A 58,40 r225 bottom (schematic designator C10)
C11_DES_0 "100n" FP-0402-L_1_0_0_05-W_0_5-IPC_A 576.629,-679.081 r90 top (schematic designator C11)
C11_DES_1 "100n" FP-0402-L_1_0_0_05-W_0_5-IPC_A 554.629,-662.08 r90 top (schematic designator C11)
C11_DES_2 "100n" FP-0402-L_1_0_0_05-W_0_5-IPC_A 73,28 r0 bottom (schematic designator C11)
C12_DES_0 "GRM188R60J106ME47D" FP-GRM188-0_1-e0_2_0_55-IPC_A 591.629,-679.081 r90 top (schematic designator C12)
C12_DES_1 "GRM188R60J106ME47D" FP-GRM188-0_1-e0_2_0_55-IPC_A 568.629,-662.08 r90 top (schematic designator C12)
C12_DES_2 "GRM188R60J106ME47D" FP-GRM188-0_1-e0_2_0_55-IPC_A 69,28 r0 bottom (schematic designator C12)
C13_DES_0 "100n" FP-0402-L_1_0_0_05-W_0_5-IPC_A 605.629,-679.081 r90 top (schematic designator C13)
C13_DES_1 "100n" FP-0402-L_1_0_0_05-W_0_5-IPC_A 582.629,-662.08 r90 top (schematic designator C13)
C13_DES_2 "100n" FP-0402-L_1_0_0_05-W_0_5-IPC_A 39,28 r180 bottom (schematic designator C13)
C14_DES_0 "GRM188R60J106ME47D" FP-GRM188-0_1-e0_2_0_55-IPC_A 620.629,-679.081 r90 top (schematic designator C14)
C14_DES_1 "GRM188R60J106ME47D" FP-GRM188-0_1-e0_2_0_55-IPC_A 597.629,-662.08 r90 top (schematic designator C14)
C14_DES_2 "GRM188R60J106ME47D" FP-GRM188-0_1-e0_2_0_55-IPC_A 43,28 r180 bottom (schematic designator C14)
C15_DES_0 "10u" FP-0402-L_1_0_0_05-W_0_5-IPC_A 520.629,-679.081 r90 top (schematic designator C15)
C15_DES_1 "10u" FP-0402-L_1_0_0_05-W_0_5-IPC_A 500.629,-662.08 r90 top (schematic designator C15)
C15_DES_2 "10u" FP-0402-L_1_0_0_05-W_0_5-IPC_A 53.5,35 r225 top (schematic designator C15)
C16_DES_0 "100n" FP-0402-L_1_0_0_05-W_0_5-IPC_A 535.629,-679.081 r90 top (schematic designator C16)
C16_DES_1 "100n" FP-0402-L_1_0_0_05-W_0_5-IPC_A 514.629,-662.08 r90 top (schematic designator C16)
C16_DES_2 "100n" FP-0402-L_1_0_0_05-W_0_5-IPC_A 52.5,36 r225 top (schematic designator C16)
C17_DES_0 "10u" FP-0402-L_1_0_0_05-W_0_5-IPC_A 490.629,-679.081 r90 top (schematic designator C17)
C17_DES_1 "10u" FP-0402-L_1_0_0_05-W_0_5-IPC_A 471.629,-662.08 r90 top (schematic designator C17)
C17_DES_2 "10u" FP-0402-L_1_0_0_05-W_0_5-IPC_A 58.5,35 r315 top (schematic designator C17)
C18_DES_0 "100n" FP-0402-L_1_0_0_05-W_0_5-IPC_A 505.629,-679.081 r90 top (schematic designator C18)
C18_DES_1 "100n" FP-0402-L_1_0_0_05-W_0_5-IPC_A 486.629,-662.08 r90 top (schematic designator C18)
C18_DES_2 "100n" FP-0402-L_1_0_0_05-W_0_5-IPC_A 59.5,36 r315 top (schematic designator C18)
C19_DES_0 "10u" FP-0402-L_1_0_0_05-W_0_5-IPC_A 461.629,-679.081 r90 top (schematic designator C19)
C19_DES_1 "10u" FP-0402-L_1_0_0_05-W_0_5-IPC_A 443.629,-662.08 r90 top (schematic designator C19)
C19_DES_2 "10u" FP-0402-L_1_0_0_05-W_0_5-IPC_A 49,30.5 r45 top (schematic designator C19)
C20_DES_0 "100n" FP-0402-L_1_0_0_05-W_0_5-IPC_A 475.629,-679.081 r90 top (schematic designator C20)
C20_DES_1 "100n" FP-0402-L_1_0_0_05-W_0_5-IPC_A 457.629,-662.08 r90 top (schematic designator C20)
C20_DES_2 "100n" FP-0402-L_1_0_0_05-W_0_5-IPC_A 48,31.5 r45 top (schematic designator C20)
C21_DES_0 "10u" FP-0402-L_1_0_0_05-W_0_5-IPC_A 431.629,-679.081 r90 top (schematic designator C21)
C21_DES_1 "10u" FP-0402-L_1_0_0_05-W_0_5-IPC_A 414.629,-662.08 r90 top (schematic designator C21)
C21_DES_2 "10u" FP-0402-L_1_0_0_05-W_0_5-IPC_A 50.5,32 r225 top (schematic designator C21)
C22_DES_0 "100n" FP-0402-L_1_0_0_05-W_0_5-IPC_A 446.629,-679.081 r90 top (schematic designator C22)
C22_DES_1 "100n" FP-0402-L_1_0_0_05-W_0_5-IPC_A 428.629,-662.08 r90 top (schematic designator C22)
C22_DES_2 "100n" FP-0402-L_1_0_0_05-W_0_5-IPC_A 49.5,33 r225 top (schematic designator C22)
C23_DES_0 "10u" FP-0402-L_1_0_0_05-W_0_5-IPC_A 401.628,-679.081 r90 top (schematic designator C23)
C23_DES_1 "10u" FP-0402-L_1_0_0_05-W_0_5-IPC_A 385.628,-662.08 r90 top (schematic designator C23)
C23_DES_2 "10u" FP-0402-L_1_0_0_05-W_0_5-IPC_A 52,33.5 r45 top (schematic designator C23)
C24_DES_0 "10n" FP-0402-L_1_0_0_05-W_0_5-IPC_A 416.629,-679.081 r90 top (schematic designator C24)
C24_DES_1 "10n" FP-0402-L_1_0_0_05-W_0_5-IPC_A 399.628,-662.08 r90 top (schematic designator C24)
C24_DES_2 "10n" FP-0402-L_1_0_0_05-W_0_5-IPC_A 51,34.5 r45 top (schematic designator C24)
C25_DES_0 "10u" FP-0402-L_1_0_0_05-W_0_5-IPC_A 371.628,-679.081 r90 top (schematic designator C25)
C25_DES_1 "10u" FP-0402-L_1_0_0_05-W_0_5-IPC_A 356.628,-662.08 r90 top (schematic designator C25)
C25_DES_2 "10u" FP-0402-L_1_0_0_05-W_0_5-IPC_A 60,33.5 r135 top (schematic designator C25)
C26_DES_0 "10n" FP-0402-L_1_0_0_05-W_0_5-IPC_A 386.628,-679.081 r90 top (schematic designator C26)
C26_DES_1 "10n" FP-0402-L_1_0_0_05-W_0_5-IPC_A 370.628,-662.08 r90 top (schematic designator C26)
C26_DES_2 "10n" FP-0402-L_1_0_0_05-W_0_5-IPC_A 61,34.5 r135 top (schematic designator C26)
C27_DES_0 "10u" FP-0402-L_1_0_0_05-W_0_5-IPC_A 341.628,-679.081 r90 top (schematic designator C27)
C27_DES_1 "10u" FP-0402-L_1_0_0_05-W_0_5-IPC_A 327.628,-662.08 r90 top (schematic designator C27)
C27_DES_2 "10u" FP-0402-L_1_0_0_05-W_0_5-IPC_A 61.5,32 r315 top (schematic designator C27)
C28_DES_0 "10n" FP-0402-L_1_0_0_05-W_0_5-IPC_A 356.628,-679.081 r90 top (schematic designator C28)
C28_DES_1 "10n" FP-0402-L_1_0_0_05-W_0_5-IPC_A 341.628,-662.08 r90 top (schematic designator C28)
C28_DES_2 "10n" FP-0402-L_1_0_0_05-W_0_5-IPC_A 62.5,33 r315 top (schematic designator C28)
C29_DES_0 "10u" FP-0402-L_1_0_0_05-W_0_5-IPC_A 311.628,-679.081 r90 top (schematic designator C29)
C29_DES_1 "10u" FP-0402-L_1_0_0_05-W_0_5-IPC_A 298.628,-662.08 r90 top (schematic designator C29)
C29_DES_2 "10u" FP-0402-L_1_0_0_05-W_0_5-IPC_A 64,31.5 r315 top (schematic designator C29)
C30_DES_0 "10n" FP-0402-L_1_0_0_05-W_0_5-IPC_A 326.628,-679.081 r90 top (schematic designator C30)
C30_DES_1 "10n" FP-0402-L_1_0_0_05-W_0_5-IPC_A 312.628,-662.08 r90 top (schematic designator C30)
C30_DES_2 "10n" FP-0402-L_1_0_0_05-W_0_5-IPC_A 63,30.5 r315 top (schematic designator C30)
C31_DES_0 "GRM21BR61E226ME44L" FP-GRM21B-0_2-e0_2_0_7-IPC_B 201.628,-679.081 r90 top (schematic designator C31)
C31_DES_1 "GRM21BR61E226ME44L" FP-GRM21B-0_2-e0_2_0_7-IPC_B 193.628,-662.08 r90 top (schematic designator C31)
C31_DES_2 "GRM21BR61E226ME44L" FP-GRM21B-0_2-e0_2_0_7-IPC_B 65.75,44.25 r180 bottom (schematic designator C31)
C32_DES_0 "GRM21BR61E226ME44L" FP-GRM21B-0_2-e0_2_0_7-IPC_B 117.628,-679.081 r90 top (schematic designator C32)
C32_DES_1 "GRM21BR61E226ME44L" FP-GRM21B-0_2-e0_2_0_7-IPC_B 112.628,-662.08 r90 top (schematic designator C32)
C32_DES_2 "GRM21BR61E226ME44L" FP-GRM21B-0_2-e0_2_0_7-IPC_B 57.25,47 r270 bottom (schematic designator C32)
C33_DES_0 "GRM21BR61E226ME44L" FP-GRM21B-0_2-e0_2_0_7-IPC_B 33.628,-679.081 r90 top (schematic designator C33)
C33_DES_1 "GRM21BR61E226ME44L" FP-GRM21B-0_2-e0_2_0_7-IPC_B 31.628,-662.08 r90 top (schematic designator C33)
C33_DES_2 "GRM21BR61E226ME44L" FP-GRM21B-0_2-e0_2_0_7-IPC_B 46.25,44.25 r0 bottom (schematic designator C33)
C34_DES_0 "GRM21BR61E226ME44L" FP-GRM21B-0_2-e0_2_0_7-IPC_B -53.372,-679.081 r90 top (schematic designator C34)
C34_DES_1 "GRM21BR61E226ME44L" FP-GRM21B-0_2-e0_2_0_7-IPC_B -53.372,-662.08 r90 top (schematic designator C34)
C34_DES_2 "GRM21BR61E226ME44L" FP-GRM21B-0_2-e0_2_0_7-IPC_B 54.75,47 r270 bottom (schematic designator C34)
C35_SER_0 "100n" FP-0402-L_1_0_0_05-W_0_5-IPC_A 648.829,-558.08 r90 top (schematic designator C35)
C35_SER_1 "100n" FP-0402-L_1_0_0_05-W_0_5-IPC_A 956.201,1632.6 r90 top (schematic designator C35)
C36_SER_0 "100n" FP-0402-L_1_0_0_05-W_0_5-IPC_A 676.829,-558.08 r90 top (schematic designator C36)
C36_SER_1 "100n" FP-0402-L_1_0_0_05-W_0_5-IPC_A 984.201,1632.6 r90 top (schematic designator C36)
C37_SER_0 "100n" FP-0402-L_1_0_0_05-W_0_5-IPC_A 633.829,-558.08 r90 top (schematic designator C37)
C37_SER_1 "100n" FP-0402-L_1_0_0_05-W_0_5-IPC_A 942.201,1632.6 r90 top (schematic designator C37)
C38_SER_0 "100n" FP-0402-L_1_0_0_05-W_0_5-IPC_A 618.829,-558.08 r90 top (schematic designator C38)
C38_SER_1 "100n" FP-0402-L_1_0_0_05-W_0_5-IPC_A 927.201,1632.6 r90 top (schematic designator C38)
C39_SER_0 "100n" FP-0402-L_1_0_0_05-W_0_5-IPC_A 588.829,-558.08 r90 top (schematic designator C39)
C39_SER_1 "100n" FP-0402-L_1_0_0_05-W_0_5-IPC_A 898.201,1632.6 r90 top (schematic designator C39)
C40_SER_0 "100n" FP-0402-L_1_0_0_05-W_0_5-IPC_A 603.829,-558.08 r90 top (schematic designator C40)
C40_SER_1 "100n" FP-0402-L_1_0_0_05-W_0_5-IPC_A 913.201,1632.6 r90 top (schematic designator C40)
C41_SER_0 "100n" FP-0402-L_1_0_0_05-W_0_5-IPC_A 573.829,-558.08 r90 top (schematic designator C41)
C41_SER_1 "100n" FP-0402-L_1_0_0_05-W_0_5-IPC_A 884.201,1632.6 r90 top (schematic designator C41)
C42_SER_0 "100n" FP-0402-L_1_0_0_05-W_0_5-IPC_A 545.829,-558.08 r90 top (schematic designator C42)
C42_SER_1 "100n" FP-0402-L_1_0_0_05-W_0_5-IPC_A 857.201,1632.6 r90 top (schematic designator C42)
C43_SER_0 "100n" FP-0402-L_1_0_0_05-W_0_5-IPC_A 515.829,-558.08 r90 top (schematic designator C43)
C43_SER_1 "100n" FP-0402-L_1_0_0_05-W_0_5-IPC_A 828.201,1632.6 r90 top (schematic designator C43)
C44_SER_0 "30p" FP-0402-L_1_0_0_05-W_0_5-IPC_A 485.829,-558.08 r90 top (schematic designator C44)
C44_SER_1 "30p" FP-0402-L_1_0_0_05-W_0_5-IPC_A 799.201,1632.6 r90 top (schematic designator C44)
C45_SER_0 "30p" FP-0402-L_1_0_0_05-W_0_5-IPC_A 500.829,-558.08 r90 top (schematic designator C45)
C45_SER_1 "30p" FP-0402-L_1_0_0_05-W_0_5-IPC_A 813.201,1632.6 r90 top (schematic designator C45)
C46_SER_0 "100n" FP-0402-L_1_0_0_05-W_0_5-IPC_A 455.828,-558.08 r90 top (schematic designator C46)
C46_SER_1 "100n" FP-0402-L_1_0_0_05-W_0_5-IPC_A 770.201,1632.6 r90 top (schematic designator C46)
C47_SER_0 "100n" FP-0402-L_1_0_0_05-W_0_5-IPC_A 440.828,-558.08 r90 top (schematic designator C47)
C47_SER_1 "100n" FP-0402-L_1_0_0_05-W_0_5-IPC_A 756.201,1632.6 r90 top (schematic designator C47)
C48_SER_0 "100n" FP-0402-L_1_0_0_05-W_0_5-IPC_A 425.828,-558.08 r90 top (schematic designator C48)
C48_SER_1 "100n" FP-0402-L_1_0_0_05-W_0_5-IPC_A 741.201,1632.6 r90 top (schematic designator C48)
C49_SER_0 "100n" FP-0402-L_1_0_0_05-W_0_5-IPC_A 116.828,-558.08 r90 top (schematic designator C49)
C49_SER_1 "100n" FP-0402-L_1_0_0_05-W_0_5-IPC_A 443.2,1632.6 r90 top (schematic designator C49)
C50_SER_0 "GRM188R60J106ME47D" FP-GRM188-0_1-e0_2_0_55-IPC_A 132.828,-558.08 r90 top (schematic designator C50)
C50_SER_1 "GRM188R60J106ME47D" FP-GRM188-0_1-e0_2_0_55-IPC_A 457.2,1632.6 r90 top (schematic designator C50)
C51_SER_0 "100n" FP-0402-L_1_0_0_05-W_0_5-IPC_A 146.828,-558.08 r90 top (schematic designator C51)
C51_SER_1 "100n" FP-0402-L_1_0_0_05-W_0_5-IPC_A 472.2,1632.6 r90 top (schematic designator C51)
C52_SER_0 "GRM188R60J106ME47D" FP-GRM188-0_1-e0_2_0_55-IPC_A 161.828,-558.08 r90 top (schematic designator C52)
C52_SER_1 "GRM188R60J106ME47D" FP-GRM188-0_1-e0_2_0_55-IPC_A 486.2,1632.6 r90 top (schematic designator C52)
C53_SER_0 "100n" FP-0402-L_1_0_0_05-W_0_5-IPC_A 176.828,-558.08 r90 top (schematic designator C53)
C53_SER_1 "100n" FP-0402-L_1_0_0_05-W_0_5-IPC_A 500.2,1632.6 r90 top (schematic designator C53)
C54_SER_0 "10n" FP-0402-L_1_0_0_05-W_0_5-IPC_A 191.828,-558.08 r90 top (schematic designator C54)
C54_SER_1 "10n" FP-0402-L_1_0_0_05-W_0_5-IPC_A 515.2,1632.6 r90 top (schematic designator C54)
C55_SER_0 "100n" FP-0402-L_1_0_0_05-W_0_5-IPC_A 86.828,-558.08 r90 top (schematic designator C55)
C55_SER_1 "100n" FP-0402-L_1_0_0_05-W_0_5-IPC_A 414.2,1632.6 r90 top (schematic designator C55)
C56_SER_0 "10n" FP-0402-L_1_0_0_05-W_0_5-IPC_A 101.828,-558.08 r90 top (schematic designator C56)
C56_SER_1 "10n" FP-0402-L_1_0_0_05-W_0_5-IPC_A 428.2,1632.6 r90 top (schematic designator C56)
C57_SER_0 "100n" FP-0402-L_1_0_0_05-W_0_5-IPC_A 56.828,-558.08 r90 top (schematic designator C57)
C57_SER_1 "100n" FP-0402-L_1_0_0_05-W_0_5-IPC_A 385.2,1632.6 r90 top (schematic designator C57)
C58_SER_0 "10n" FP-0402-L_1_0_0_05-W_0_5-IPC_A 71.828,-558.08 r90 top (schematic designator C58)
C58_SER_1 "10n" FP-0402-L_1_0_0_05-W_0_5-IPC_A 399.2,1632.6 r90 top (schematic designator C58)
C59_SER_0 "10u" FP-0402-L_1_0_0_05-W_0_5-IPC_A 12.828,-558.08 r90 top (schematic designator C59)
C59_SER_1 "10u" FP-0402-L_1_0_0_05-W_0_5-IPC_A 342.2,1632.6 r90 top (schematic designator C59)
C60_SER_0 "10u" FP-0402-L_1_0_0_05-W_0_5-IPC_A 27.828,-558.08 r90 top (schematic designator C60)
C60_SER_1 "10u" FP-0402-L_1_0_0_05-W_0_5-IPC_A 356.2,1632.6 r90 top (schematic designator C60)
C61_SER_0 "100n" FP-0402-L_1_0_0_05-W_0_5-IPC_A 42.828,-558.08 r90 top (schematic designator C61)
C61_SER_1 "100n" FP-0402-L_1_0_0_05-W_0_5-IPC_A 371.2,1632.6 r90 top (schematic designator C61)
C? "C1005X7R1H104K050BB" FP-C1005-050-0_05-IPC_C 193.628,-924.081 r0 top
C? "GRM188R60J106ME47D" FP-GRM188-0_1-e0_2_0_55-IPC_A -12.372,-925.081 r0 top
C? "C0402C479C5GACTU" FP-C0402-BB-MFG 171.628,-924.081 r0 top value="4.7 pF"
C? "GRM1555C1H120GA01D" FP-GRM155-0_05-MFG 73.628,-924.081 r0 top
C? "C1005X7R1H104K050BB" FP-C1005-050-0_05-IPC_C 262.628,-924.081 r0 top
C? "C1005X7R1H104K050BB" FP-C1005-050-0_05-IPC_C 297.628,-924.081 r0 top
C? "C1005X7R1H104K050BB" FP-C1005-050-0_05-IPC_C 288.628,-924.081 r0 top
C? "C1005X7R1H104K050BB" FP-C1005-050-0_05-IPC_C -31.372,-924.081 r0 top
C? "C0402C479C5GACTU" FP-C0402-BB-MFG 210.628,-924.081 r0 top value="4.7 pF"
C? "C1005X7R1H104K050BB" FP-C1005-050-0_05-IPC_C 245.628,-924.081 r0 top
C? "100n" FP-0402-L_1_0_0_05-W_0_5-IPC_A 35.628,-732.081 r0 top
C? "100n" FP-0402-L_1_0_0_05-W_0_5-IPC_A 122.628,-732.081 r0 top
C? "100n" FP-0402-L_1_0_0_05-W_0_5-IPC_A 39.628,-732.081 r0 top
C? "100n" FP-0402-L_1_0_0_05-W_0_5-IPC_A 52.628,-732.081 r0 top
C? "100n" FP-0402-L_1_0_0_05-W_0_5-IPC_A 126.628,-732.081 r0 top
C? "C1005X7R1H104K050BB" FP-C1005-050-0_05-IPC_C -19.372,-760.081 r0 top
C? "100nF" FP-0402-L_1_0_0_05-W_0_5-IPC_A 204.628,-760.081 r0 top
C? "100nF" FP-0402-L_1_0_0_05-W_0_5-IPC_A 169.628,-760.081 r0 top
C? "100n" FP-0402-L_1_0_0_05-W_0_5-IPC_A 5.628,-732.081 r0 top
C? "GRM188R60J106ME47D" FP-GRM188-0_1-e0_2_0_55-IPC_A -13.372,-760.081 r0 top
C? "C0805C221K5RACTU" CAPC2013X88X50ML20T25 -4.372,-933.081 r0 top
C? "CL05A106MP5NUNC" FP-CL05A106MP5NUNC-MFG -19.372,-932.081 r0 top value=10uF
C? "C0805C221K5RACTU" CAPC2013X88X50ML20T25 -27.372,-933.081 r0 top
C? "C1005X7R1H104K050BB" FP-C1005-050-0_05-IPC_C 85.628,-933.081 r0 top
C? "C0805C221K5RACTU" CAPC2013X88X50ML20T25 81.628,-933.081 r0 top
C? "C0805C221K5RACTU" CAPC2013X88X50ML20T25 99.628,-933.081 r0 top
C? "CL05A106MP5NUNC" FP-CL05A106MP5NUNC-MFG 89.628,-932.081 r0 top value=10uF
C? "CL05A106MP5NUNC" FP-CL05A106MP5NUNC-MFG -10.372,-932.081 r0 top value=10uF
C? "C1005X7R1H104K050BB" FP-C1005-050-0_05-IPC_C 75.628,-933.081 r0 top
C? "CL05A106MP5NUNC" FP-CL05A106MP5NUNC-MFG 94.628,-932.081 r0 top value=10uF
C? "C0402C221K5RAC7867" CAPC1005X60X30NL05T10 140.628,-924.081 r0 top
C? "GRM188R60J106ME47D" FP-GRM188-0_1-e0_2_0_55-IPC_A -26.372,-925.081 r0 top
C? "C1005X7R1H104K050BB" FP-C1005-050-0_05-IPC_C 253.628,-924.081 r0 top
C? "C1005X7R1H104K050BB" FP-C1005-050-0_05-IPC_C 271.628,-924.081 r0 top
C? "C1005X7R1H104K050BB" FP-C1005-050-0_05-IPC_C 279.628,-924.081 r0 top
C? "C1005X7R1H104K050BB" FP-C1005-050-0_05-IPC_C -23.372,-933.081 r0 top
C? "C1005X7R1H104K050BB" FP-C1005-050-0_05-IPC_C -33.372,-933.081 r0 top
C? "C0402C221K5RAC7867" CAPC1005X60X30NL05T10 136.628,-924.081 r0 top
C? "C1005X7R1H104K050BB" FP-C1005-050-0_05-IPC_C 236.628,-924.081 r0 top
C? "C1005X7R1H104K050BB" FP-C1005-050-0_05-IPC_C -22.372,-924.081 r0 top
C? "C1005X7R1A224K050BB" FP-C1005-050-0_05-IPC_C 188.628,-706.081 r0 top
C? "C1005X7R1H104K050BB" FP-C1005-050-0_05-IPC_C -18.372,-706.081 r0 top
C? "C1005X7R1A224K050BB" FP-C1005-050-0_05-IPC_C 99.628,-706.081 r0 top
C? "GRM188R60J106ME47D" FP-GRM188-0_1-e0_2_0_55-IPC_A 4.628,-707.081 r0 top
C? "C1005X7R1A224K050BB" FP-C1005-050-0_05-IPC_C 95.628,-706.081 r0 top
C? "C1005X7R1A224K050BB" FP-C1005-050-0_05-IPC_C 179.628,-706.081 r0 top
C? "C1005X7R1A224K050BB" FP-C1005-050-0_05-IPC_C 192.628,-706.081 r0 top
C? "C1005X7R1H104K050BB" FP-C1005-050-0_05-IPC_C -14.372,-706.081 r0 top
C? "GRM188R60J106ME47D" FP-GRM188-0_1-e0_2_0_55-IPC_A 9.628,-707.081 r0 top
C? "C1005X7R1A224K050BB" FP-C1005-050-0_05-IPC_C 166.628,-706.081 r0 top
C? "C1005X7R1H104K050BB" FP-C1005-050-0_05-IPC_C -10.372,-706.081 r0 top
C? "C1005X7R1H104K050BB" FP-C1005-050-0_05-IPC_C -35.372,-695.081 r0 top
C? "T520B337M2R5ATE045" KEMT-520-B-2_M -29.372,-696.081 r0 top
C? "C1005X7R1A224K050BB" FP-C1005-050-0_05-IPC_C 183.628,-706.081 r0 top
C? "C1005X7R1A224K050BB" FP-C1005-050-0_05-IPC_C 175.628,-706.081 r0 top
C? "C1005X7R1H104K050BB" FP-C1005-050-0_05-IPC_C -23.372,-706.081 r0 top
C? "C1005X7R1H104K050BB" FP-C1005-050-0_05-IPC_C -5.372,-706.081 r0 top
C? "GRM188R60J106ME47D" FP-GRM188-0_1-e0_2_0_55-IPC_A 14.628,-707.081 r0 top
C? "100n" FP-0402-L_1_0_0_05-W_0_5-IPC_A 88.628,-732.081 r0 top
C? "100n" FP-0402-L_1_0_0_05-W_0_5-IPC_A 61.628,-732.081 r0 top
C? "100n" FP-0402-L_1_0_0_05-W_0_5-IPC_A 93.628,-732.081 r0 top
C? "100n" FP-0402-L_1_0_0_05-W_0_5-IPC_A 10.628,-732.081 r0 top
C? "100n" FP-0402-L_1_0_0_05-W_0_5-IPC_A 56.628,-732.081 r0 top
C? "100n" FP-0402-L_1_0_0_05-W_0_5-IPC_A 101.628,-732.081 r0 top
C? "100n" FP-0402-L_1_0_0_05-W_0_5-IPC_A 48.628,-732.081 r0 top
C? "100n" FP-0402-L_1_0_0_05-W_0_5-IPC_A 43.628,-732.081 r0 top
C? "100n" FP-0402-L_1_0_0_05-W_0_5-IPC_A 1.628,-732.081 r0 top
C? "C1005X7R1A224K050BB" FP-C1005-050-0_05-IPC_C 196.628,-706.081 r0 top
C? "C1005X7R1A224K050BB" FP-C1005-050-0_05-IPC_C 171.628,-706.081 r0 top
C? "C1005X7R1H104K050BB" FP-C1005-050-0_05-IPC_C -1.372,-706.081 r0 top
C? "C1005X7R1H104K050BB" FP-C1005-050-0_05-IPC_C -49.372,-706.081 r0 top
C? "100n" FP-0402-L_1_0_0_05-W_0_5-IPC_A 69.628,-732.081 r0 top
C? "100n" FP-0402-L_1_0_0_05-W_0_5-IPC_A 30.628,-732.081 r0 top
C? "100n" FP-0402-L_1_0_0_05-W_0_5-IPC_A 65.628,-732.081 r0 top
C? "100n" FP-0402-L_1_0_0_05-W_0_5-IPC_A 84.628,-732.081 r0 top
C? "100n" FP-0402-L_1_0_0_05-W_0_5-IPC_A 97.628,-732.081 r0 top
C?_FAN_IF_0 "C1005X7R1H104K050BB" FP-C1005-050-0_05-IPC_C 177.628,-631.08 r90 top (schematic designator C?)
C?_FAN_IF_0 "C1005X7R1H104K050BB" FP-C1005-050-0_05-IPC_C 159.628,-631.08 r90 top (schematic designator C?)
C?_FAN_IF_1 "C1005X7R1H104K050BB" FP-C1005-050-0_05-IPC_C 170.628,-617.08 r90 top (schematic designator C?)
C?_FAN_IF_1 "C1005X7R1H104K050BB" FP-C1005-050-0_05-IPC_C 153.628,-617.08 r90 top (schematic designator C?)
D1_DES_0 "ESD204DQAR" FP-DQA0010A-MFG 550.629,-679.081 r90 top value=0.55pF (schematic designator D1)
D1_DES_1 "ESD204DQAR" FP-DQA0010A-MFG 529.629,-661.08 r90 top value=0.55pF (schematic designator D1)
D1_DES_2 "ESD204DQAR" FP-DQA0010A-MFG 61,58 r180 bottom value=0.55pF (schematic designator D1)
D2_DES_0 "ESD204DQAR" FP-DQA0010A-MFG 563.629,-679.081 r90 top value=0.55pF (schematic designator D2)
D2_DES_1 "ESD204DQAR" FP-DQA0010A-MFG 542.629,-661.08 r90 top value=0.55pF (schematic designator D2)
D2_DES_2 "ESD204DQAR" FP-DQA0010A-MFG 51,58 r0 bottom value=0.55pF (schematic designator D2)
D5_SER_0 "ESD204DQAR" FP-DQA0010A-MFG 368.828,-558.08 r90 top value=0.55pF (schematic designator D5)
D5_SER_1 "ESD204DQAR" FP-DQA0010A-MFG 686.201,1633.6 r90 top value=0.55pF (schematic designator D5)
D? "ESD204DQAR or PUSB3AB4Z" FP-DQA0010A-MFG 126.628,-761.081 r0 top value=0.55pF
D? "ESD204DQAR" FP-DQA0010A-MFG 157.628,-761.081 r0 top value=0.55pF
D? "ESD204DQAR or PUSB3AB4Z" FP-DQA0010A-MFG 101.628,-761.081 r0 top value=0.55pF
D? "ESD204DQAR or PUSB3AB4Z" FP-DQA0010A-MFG 96.628,-761.081 r0 top value=0.55pF
D? "ESD204DQAR" FP-DQA0010A-MFG 135.628,-761.081 r0 top value=0.55pF
D? "ESD204DQAR or PUSB3AB4Z" FP-DQA0010A-MFG 114.628,-761.081 r0 top value=0.55pF
D? "ESD204DQAR or PUSB3AB4Z" FP-DQA0010A-MFG 183.628,-761.081 r0 top value=0.55pF
D? "ESD204DQAR or PUSB3AB4Z" FP-DQA0010A-MFG 233.628,-925.081 r0 top value=0.55pF
D? "ESD204DQAR or PUSB3AB4Z" FP-DQA0010A-MFG 168.628,-925.081 r0 top value=0.55pF
D? "BAT54CWT1G" ONSC-SOT-323-3-419-04_V 35.628,-925.081 r0 top
D? "ESD204DQAR" FP-DQA0010A-MFG 196.628,-761.081 r0 top value=0.55pF
D? "ESD204DQAR or PUSB3AB4Z" FP-DQA0010A-MFG 122.628,-761.081 r0 top value=0.55pF
D? "ESD204DQAR or PUSB3AB4Z" FP-DQA0010A-MFG 198.628,-925.081 r0 top value=0.55pF
D? "ESD204DQAR or PUSB3AB4Z" FP-DQA0010A-MFG 105.628,-761.081 r0 top value=0.55pF
D? "ESD204DQAR or PUSB3AB4Z" FP-DQA0010A-MFG 144.628,-761.081 r0 top value=0.55pF
D? "ESD204DQAR or PUSB3AB4Z" FP-DQA0010A-MFG 152.628,-761.081 r0 top value=0.55pF
D? "150066RG54050" WL-SBCD_0606 47.628,-707.081 r0 top
D? "ESD204DQAR" FP-DQA0010A-MFG 139.628,-761.081 r0 top value=0.55pF
D? "ESD204DQAR or PUSB3AB4Z" FP-DQA0010A-MFG 201.628,-761.081 r0 top value=0.55pF
D? "ESD204DQAR" FP-DQA0010A-MFG 161.628,-761.081 r0 top value=0.55pF
D? "ESD204DQAR or PUSB3AB4Z" FP-DQA0010A-MFG 131.628,-761.081 r0 top value=0.55pF
D? "ESD204DQAR or PUSB3AB4Z" FP-DQA0010A-MFG 109.628,-761.081 r0 top value=0.55pF
D? "ESD204DQAR or PUSB3AB4Z" FP-DQA0010A-MFG 118.628,-761.081 r0 top value=0.55pF
D? "ESD204DQAR" FP-DQA0010A-MFG 165.628,-761.081 r0 top value=0.55pF
D? "ESD204DQAR" FP-DQA0010A-MFG 188.628,-761.081 r0 top value=0.55pF
D? "ESD204DQAR" FP-DQA0010A-MFG 192.628,-761.081 r0 top value=0.55pF
F1_DES_0 "2920L050DR" FP-2920L050DR-MFG 259.628,-682.081 r90 top (schematic designator F1)
F1_DES_1 "2920L050DR" FP-2920L050DR-MFG 249.628,-664.081 r90 top (schematic designator F1)
F1_DES_2 "2920L050DR" FP-2920L050DR-MFG 74.5,33 r90 top (schematic designator F1)
F2_DES_0 "2920L050DR" FP-2920L050DR-MFG 176.628,-682.081 r90 top (schematic designator F2)
F2_DES_1 "2920L050DR" FP-2920L050DR-MFG 168.628,-664.081 r90 top (schematic designator F2)
F2_DES_2 "2920L050DR" FP-2920L050DR-MFG 68.5,33 r90 top (schematic designator F2)
F3_DES_0 "2920L050DR" FP-2920L050DR-MFG 91.628,-682.081 r90 top (schematic designator F3)
F3_DES_1 "2920L050DR" FP-2920L050DR-MFG 87.628,-664.081 r90 top (schematic designator F3)
F3_DES_2 "2920L050DR" FP-2920L050DR-MFG 37.5,33 r90 top (schematic designator F3)
F4_DES_0 "2920L050DR" FP-2920L050DR-MFG 7.628,-682.081 r90 top (schematic designator F4)
F4_DES_1 "2920L050DR" FP-2920L050DR-MFG 5.628,-664.081 r90 top (schematic designator F4)
F4_DES_2 "2920L050DR" FP-2920L050DR-MFG 43.5,33 r90 top (schematic designator F4)
F?_FAN_IF_0 "2920L050DR" FP-2920L050DR-MFG 214.628,-633.08 r90 top (schematic designator F?)
F?_FAN_IF_1 "2920L050DR" FP-2920L050DR-MFG 207.628,-619.08 r90 top (schematic designator F?)
FB? "BLM15PX601SN1D" FP-BLM15-0_05-MFG 101.628,-924.081 r90 top
FB? "BLM15PX601SN1D" FP-BLM15-0_05-MFG 18.628,-924.081 r90 top
FB? "BLM15PX601SN1D" FP-BLM15-0_05-MFG 52.628,-924.081 r90 top
FB? "BLM15PX601SN1D" FP-BLM15-0_05-MFG 67.628,-924.081 r90 top
FB? "BLM15PX601SN1D" FP-BLM15-0_05-MFG 120.628,-924.081 r90 top
FB? "BLM15PX601SN1D" FP-BLM15-0_05-MFG 130.628,-924.081 r90 top
FB? "BLM15PX601SN1D" FP-BLM15-0_05-MFG 91.628,-924.081 r90 top
FB? "BLM15PX601SN1D" FP-BLM15-0_05-MFG 29.628,-924.081 r90 top
J1 "FM4-NZSP-PCB-1" FM4-NZSP-PCB-1-Footprint-1 216,9 r0 top
J2 "FM4-NZSP-PCB-1" FM4-NZSP-PCB-1-Footprint-1 202,9 r0 top
J3 "FM4-NZSP-PCB-1" FM4-NZSP-PCB-1-Footprint-1 56,58 r0 top
J4 "FA1-NDRP-PCB-8" FA1-NDRP-PCB-8-Footprint-1 77.628,-750.081 r0 top
J5 "FA1-NDRP-PCB-8" FA1-NDRP-PCB-8-Footprint-1 -5.372,-750.081 r0 top
J? "2309413-1" FP-2309413-1-MFG 196.628,-881.081 r90 top
J? "2309413-1" FP-2309413-1-MFG 224.628,-881.081 r90 top
J? "2309413-1" FP-2309413-1-MFG 140.628,-881.081 r90 top
J? "2309413-1" FP-2309413-1-MFG 112.628,-881.081 r90 top
J? "2309413-1" FP-2309413-1-MFG 56.628,-881.081 r90 top
J? "TSW-102-07-L-S" FP-TSW-102-07-L-S-MFG 64.628,-762.081 r90 top
J? "35RASMT4BHNTRX" SWIT-35RASMT4BHNTRX_V 51.628,-940.081 r90 top
J? "B7B-PH-K-S" FP-B7B-PH-K-S-MFG 25.628,-940.081 r90 top
J? "2309413-1" FP-2309413-1-MFG 251.628,-881.081 r90 top
J? "2309413-1" FP-2309413-1-MFG 168.628,-881.081 r90 top
J? "2309413-1" FP-2309413-1-MFG 84.628,-881.081 r90 top
J? "1-2199230-6" FP-1-2199230-6-MFG 125.628,-717.081 r90 top
J? "1-2199230-6" FP-1-2199230-6-MFG 137.628,-717.081 r90 top
J? "1-2199230-6" FP-1-2199230-6-MFG 148.628,-717.081 r90 top
J? "105133-0001" MOLX-105133-0001_V -22.372,-698.081 r90 top
J? "1-2199230-6" FP-1-2199230-6-MFG 159.628,-717.081 r90 top
J? "HTSW-104-07-G-S" FP-HTSW-104-07-G-S-MFG -48.372,-736.081 r90 top
J? "47659-1102" FP-47659-1102-MFG -41.372,-739.081 r90 top
J? "QTH-020-02-L-D-DP-A-K" QTH-020-02-L-D-DP-A-K-Footprint-1 -31.372,-741.081 r90 top
J?_FAN_IF_0 "47053-1000" FP-470531000-MFG 19.628,-634.08 r90 top (schematic designator J?)
J?_FAN_IF_1 "47053-1000" FP-470531000-MFG 17.628,-620.08 r90 top (schematic designator J?)
L1_DES_0 "744066101" WE-TPC_1038 275.628,-683.081 r0 top (schematic designator L1)
L1_DES_1 "744066101" WE-TPC_1038 264.628,-666.081 r0 top (schematic designator L1)